# EAGLE board Parachute_V1.5 (EAGLE 9.6.2)
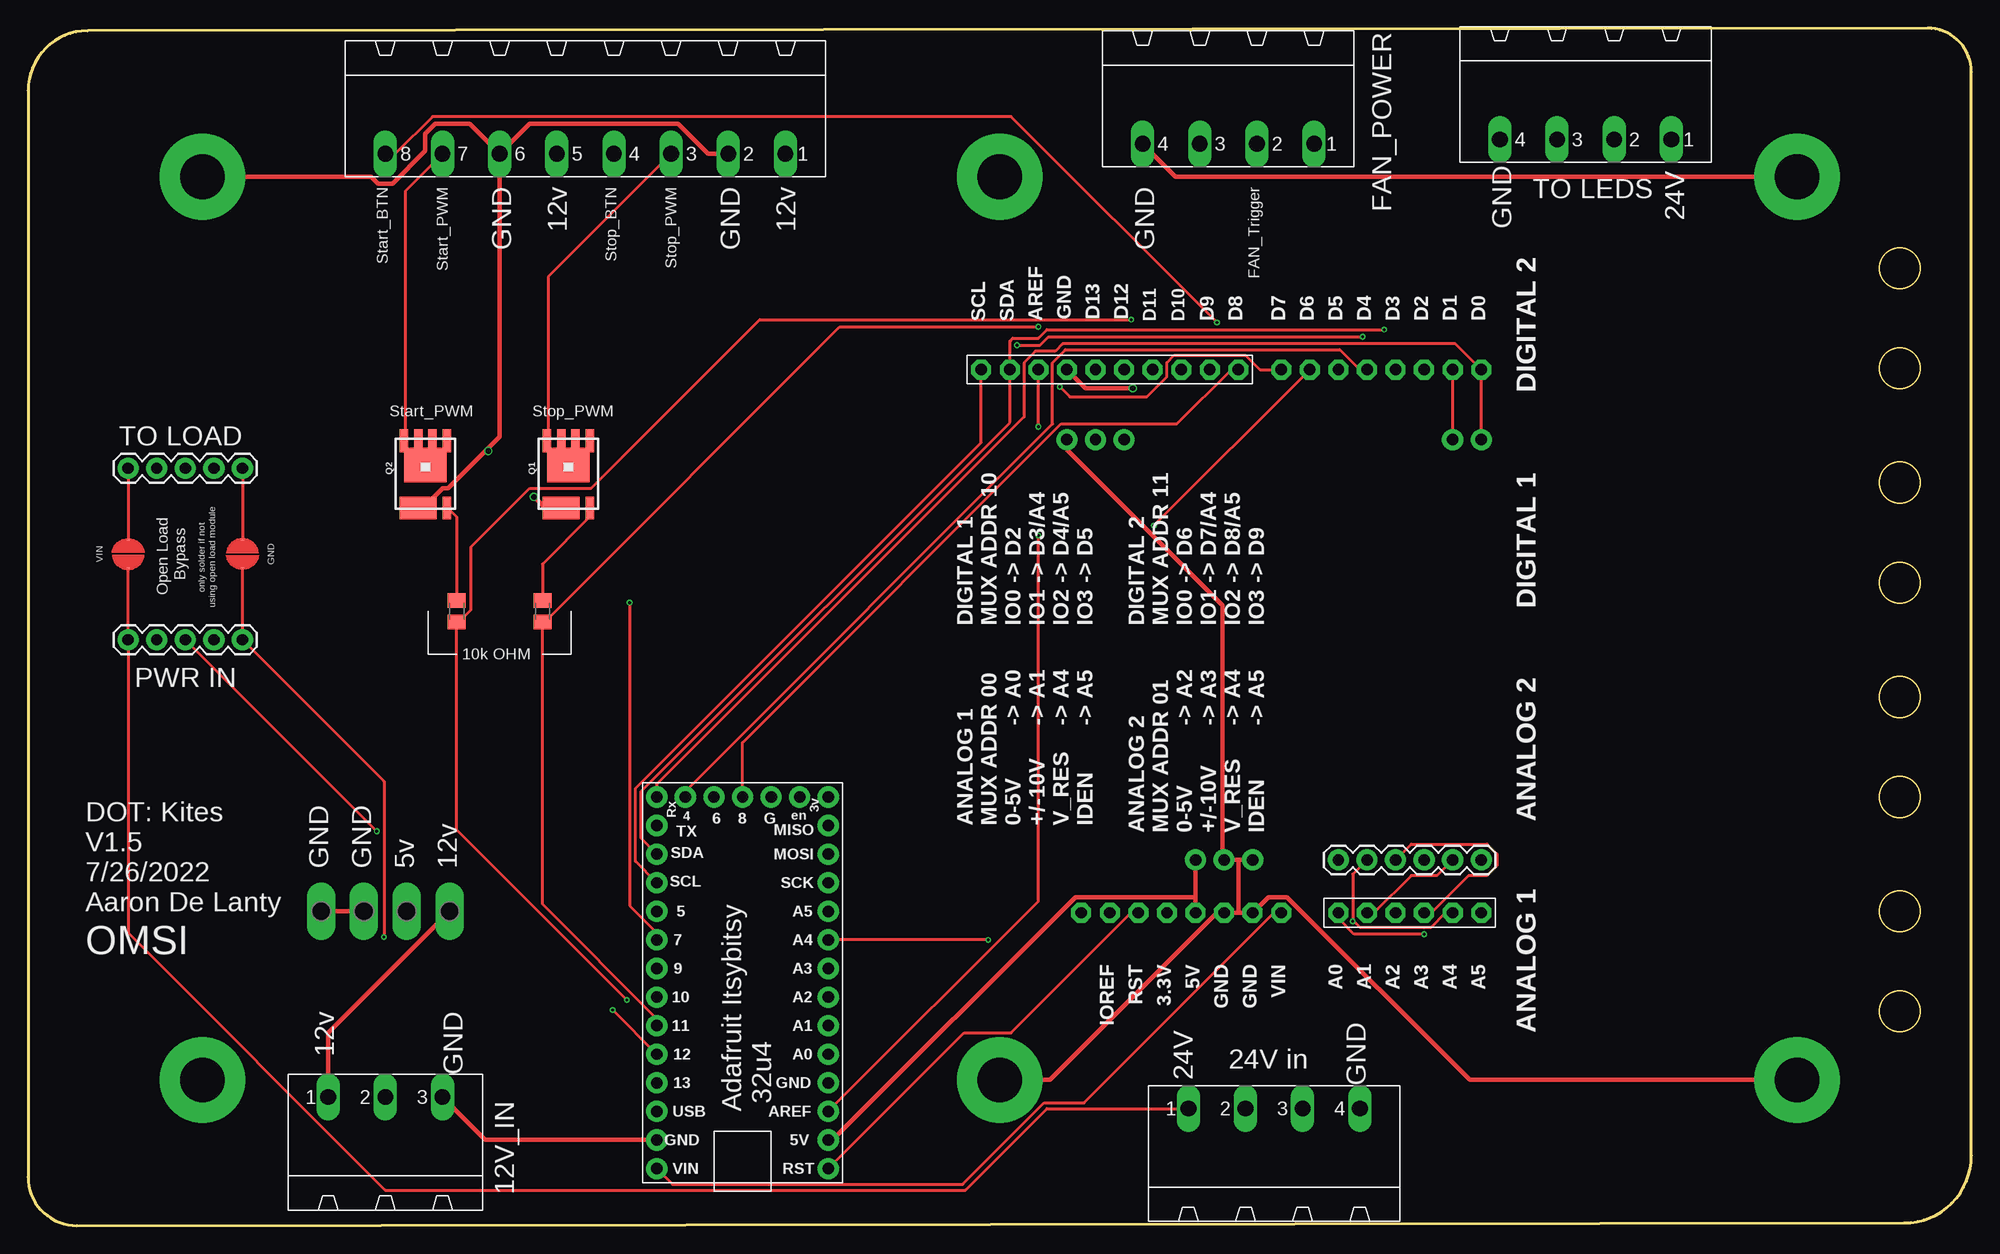
[diagram p0: board, top side]
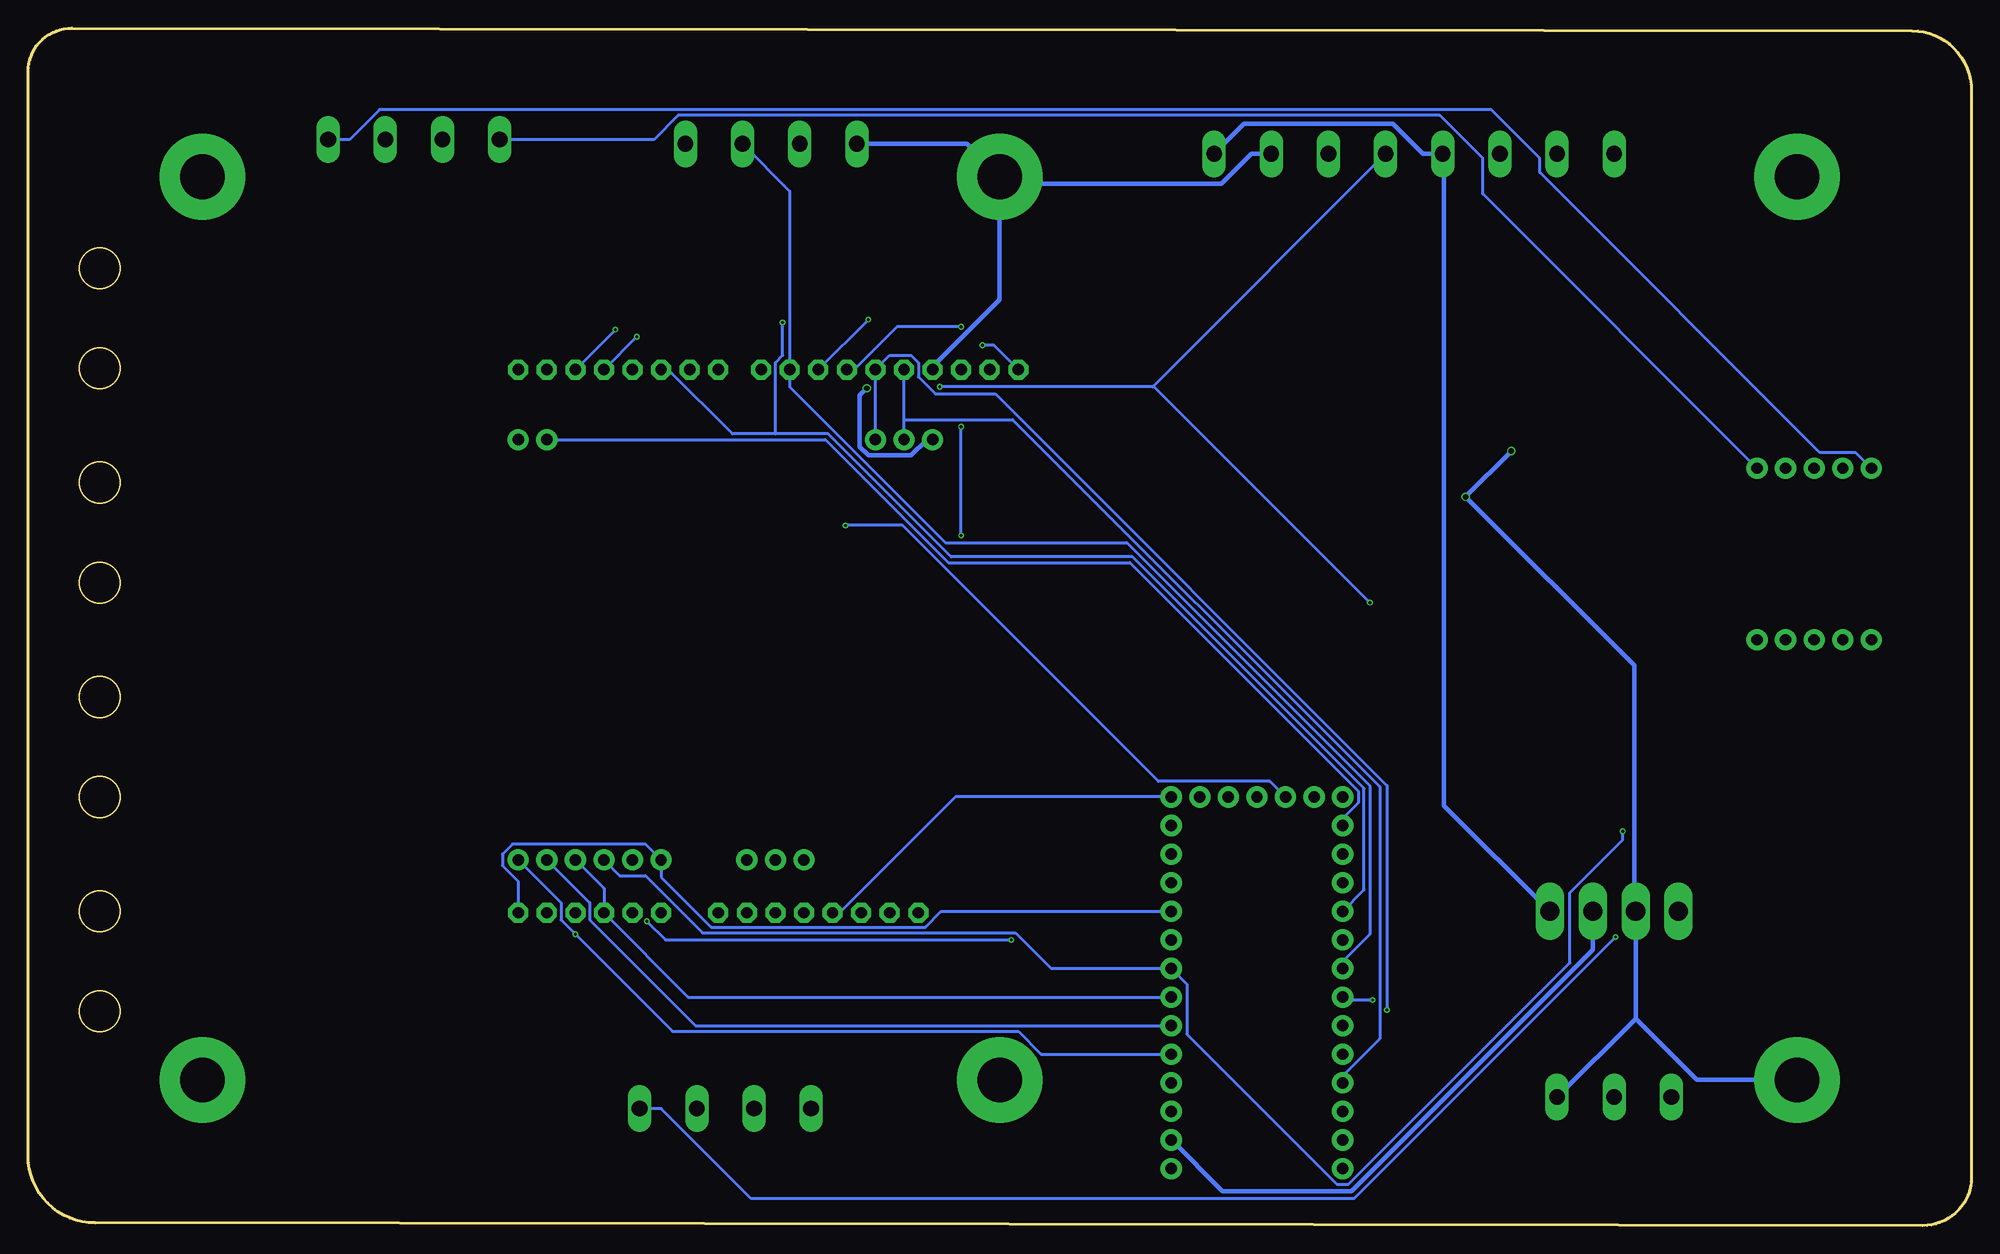
[diagram p1: board, bottom side, seen from below]

Size 172.72 x 106.41 mm. Coordinates in mm from the lower left corner, seen from the top.
Outline: 168.83,106.41 5.28,106.17 arc90 0,100.89 0,4.33 arc90 4.33,0 166.75,0.24 arc90 172.72,6.22 172.72,102.53 arc90 168.83,106.41
Outline: circle at 166.37,19.04 radius 1.8
Outline: circle at 166.37,27.93 radius 1.8
Outline: circle at 166.37,38.09 radius 1.8
Outline: circle at 166.37,46.98 radius 1.8
Outline: circle at 166.37,57.14 radius 1.8
Outline: circle at 166.37,66.03 radius 1.8
Outline: circle at 166.37,76.19 radius 1.8
Outline: circle at 166.37,85.08 radius 1.8
Copper layers (1*16): Top 0.035559375mm / dielectric 1.6mm / Bottom 0.035559375mm
Design rules "oshpark-2layer (1) *": minimum track width 10mil, minimum drill 10mil, track to track 10mil, track to pad 10mil, pad to pad 8mil, via to via 10mil, smd to smd 8mil, copper to edge 15mil, drill to drill 6mil, minimum pad ring 5mil, minimum via ring 5mil, stop-mask expansion 2.5mil, vias tented up to drill 25mil, thermal gap 10mil
Net classes: 1 High Power: width 0.406 mm, drill 0.483 mm

## Footprints (pad centres in the part's own frame; a part is rotated, then mirrored left to right if it is on the bottom)
M0805 = smd 1.3 x 1.6: 1 -0.95,0; 2 0.95,0
MSTBA3 = drill 1.397 long: 1 -5.08,5.08; 2 0,5.08; 3 5.08,5.08
MSTBA4 = drill 1.397 long: 1 -7.62,5.08; 2 -2.54,5.08; 3 2.54,5.08; 4 7.62,5.08
HEADER_PIN_1X05 = drill 1.016 pad 1.88: 1 0,0; 2 2.54,0; 3 5.08,0; 4 7.62,0; 5 10.16,0
1X08-CLEANBIG = drill 1.016 pad 1.778 octagon: 1 -8.89,0; 2 -6.35,0; 3 -3.81,0; 4 -1.27,0; 5 1.27,0; 6 3.81,0; 7 6.35,0; 8 8.89,0
1X06-BIG = drill 1.016 pad 1.778 octagon: 1 -6.35,0; 2 -3.81,0; 3 -1.27,0; 4 1.27,0; 5 3.81,0; 6 6.35,0
SMT-JUMPER_2_NO_NO-SILK_ROUND = smd 0.152 x 0.305: 1 -1.27,0; 2 1.27,0
1X03_NO_SILK = drill 1.016 pad 1.88: 1 0,0; 2 2.54,0; 3 5.08,0
1X02_NO_SILK = drill 1.016 pad 1.88: 1 0,0; 2 2.54,0
1X06 = drill 1.016 pad 1.88: 1 0,0; 2 2.54,0; 3 5.08,0; 4 7.62,0; 5 10.16,0; 6 12.7,0
SO-8_POWER_PAK = smd 0.762 x 2.032: D1 -3.423,2.437; D2 -2.153,2.437; D3 -0.883,2.437; D4 0.387,2.437; G 0.387,-3.532 | smd 3.81 x 3.048: D5 -1.518,0.278 | smd 3.302 x 2.032: S -2.153,-3.532
STANDOFF_ELECTRICAL_5_32 = drill 3.969 pad 7.62: P1 0,0
P2-38-17 = drill 1.702 pad 2.121 long: TP-1 -1.905,0; TP-2 1.905,0
ADAFRUIT_LENOARDO = drill 1.016 pad 1.88: 3V -10.16,-21.59; 5V -10.16,8.89; A0 -10.16,1.27; A1 -10.16,-1.27; A2 -10.16,-3.81; A3 -10.16,-6.35; A4 -10.16,-8.89; A5 -10.16,-11.43; AREF -10.16,6.35; D4 2.54,-21.59; D5 5.08,-11.43; D6 0,-21.59; D7 5.08,-8.89; D8 -2.54,-21.59; D9 5.08,-6.35; D10 5.08,-3.81; D11 5.08,-1.27; D12 5.08,1.27; D13 5.08,3.81; EN -7.62,-21.59; GND@0 -10.16,3.81; GND@1 -5.08,-21.59; GND@2 5.08,8.89; MISO -10.16,-19.05; MOSI -10.16,-16.51; RES -10.16,11.43; RX 5.08,-21.59; SCK -10.16,-13.97; SCL 5.08,-13.97; SDA 5.08,-16.51; TX 5.08,-19.05; USB 5.08,6.35; VIN 5.08,11.43
1X10-BIG = drill 1.016 pad 1.778 octagon: 1 -11.43,0; 2 -8.89,0; 3 -6.35,0; 4 -3.81,0; 5 -1.27,0; 6 1.27,0; 7 3.81,0; 8 6.35,0; 9 8.89,0; 10 11.43,0
MSTBA8 = drill 1.397 long: 1 -17.78,5.08; 2 -12.7,5.08; 3 -7.62,5.08; 4 -2.54,5.08; 5 2.54,5.08; 6 7.62,5.08; 7 12.7,5.08; 8 17.78,5.08
PHOENIX_508_4PIN = drill 1.397 long: 1 -7.62,5.08; 2 -2.54,5.08; 3 2.54,5.08; 4 7.62,5.08

## Placement (x,y rotation side)
10K  [M0805]  45.72,54.6 270 top
10K1  [M0805]  38.1,54.6 270 top
12V_IN  MSTBA3  [MSTBA3]  31.75,6.34 0 top
FAN_POWER  MSTBA4  [MSTBA4]  106.68,101.21 180 top
J1  [HEADER_PIN_1X05]  8.89,67.3 0 top
J2  [HEADER_PIN_1X05]  8.89,52.06 0 top
JP1  [1X08-CLEANBIG]  120.27,76.07 180 top
JP2  [1X08-CLEANBIG]  102.49,27.81 180 top
JP3  [1X06-BIG]  122.81,27.81 0 top
JP4  JUMPER-SMT_2_NO_NO-SILK_ROUND  [SMT-JUMPER_2_NO_NO-SILK_ROUND]  8.89,59.68 270 top
JP5  JUMPER-SMT_2_NO_NO-SILK_ROUND  [SMT-JUMPER_2_NO_NO-SILK_ROUND]  19.05,59.68 90 top
JP9  [1X03_NO_SILK]  103.76,32.51 0 top
JP10  [1X03_NO_SILK]  92.33,69.84 0 top
JP11  M021X02_NO_SILK  [1X02_NO_SILK]  126.62,69.84 0 top
JP12  Male  [1X06]  116.46,32.51 0 top
Q1  MOSFET-NCH  [SO-8_POWER_PAK]  49.53,67.3 0 top
Q2  MOSFET-NCH  [SO-8_POWER_PAK]  36.83,67.3 0 top
S1  STANDOFF_ELECTRICAL5-32  [STANDOFF_ELECTRICAL_5_32]  15.49,93.21 0 top
S2  STANDOFF_ELECTRICAL5-32  [STANDOFF_ELECTRICAL_5_32]  86.36,93.21 0 top
S3  STANDOFF_ELECTRICAL5-32  [STANDOFF_ELECTRICAL_5_32]  157.23,12.95 0 top
S4  STANDOFF_ELECTRICAL5-32  [STANDOFF_ELECTRICAL_5_32]  157.23,93.21 0 top
S6  STANDOFF_ELECTRICAL5-32  [STANDOFF_ELECTRICAL_5_32]  86.36,12.95 0 top
S8  STANDOFF_ELECTRICAL5-32  [STANDOFF_ELECTRICAL_5_32]  15.49,12.95 0 top
TP1  PTR2  [P2-38-17]  27.94,27.93 0 top
TP2  PTR2  [P2-38-17]  35.56,27.93 0 top
U1  ITSYBITSY_5V  [ADAFRUIT_LENOARDO]  60.96,16.5 180 top
U$1  PINHD-1X10  [1X10-BIG]  96.14,76.07 180 top
X1  MSTBA8  [MSTBA8]  49.53,100.32 180 top
X2  PHOENIX_508_4PIN  [PHOENIX_508_4PIN]  138.43,101.59 180 top
X3  PHOENIX_508_4PIN  [PHOENIX_508_4PIN]  110.74,5.33 0 top

## Library data of the parts
10K 10K1 JP1-JP3 U$1 = adafruit
12V_IN = con-phoenix-508; MF: FARNELL; MPN: 1757255; OC_FARNELL: 3705183; OC_NEWARK: 71C4162
FAN_POWER = th_libraries; MF: FARNELL; MPN: 1757268; OC_FARNELL: 3705195; OC_NEWARK: 71C4163
J1 J2 = OMSI_Default_V1
JP4 JP5 = SparkFun-Jumpers
JP9-JP12 = SparkFun-Connectors
Q1 Q2 U1 = th_ds_libraries
S1-S4 S6 S8 = th_libraries
TP1 TP2 = testpad
X1 = con-phoenix-508; MF: FARNELL; MPN: 1757307; OC_FARNELL: 3705225; OC_NEWARK: 71C4166
X2 X3 = OMSI_Default_V1; MF: FARNELL; MPN: 1757268; OC_FARNELL: 3705195; OC_NEWARK: 71C4163

## Nets
5V [High Power]: JP2.4 JP9.1 TP2.TP-1 U1.5V
12V [High Power]: 12V_IN.1 TP2.TP-2 X1.1 X1.5
A3: J2.3 JP3.4 JP12.3 U1.A3
GND [High Power]: 12V_IN.3 FAN_POWER.4 JP2.2 JP2.3 JP9.2 JP9.3 JP10.1 Q1.S Q2.S S1.P1 S2.P1 S3.P1 S4.P1 S6.P1 S8.P1 TP1.TP-1 TP1.TP-2 U1.GND@2 U$1.7 X1.2 X1.6
N$1: Q2.D1 X1.7
N$2: Q1.D1 X1.3
N$3: JP1.1 JP11.2 U1.RX
N$4: U1.D8 U$1.1
N$5: JP1.2 JP11.1 U1.TX
N$6: U1.AREF U$1.8
N$7: 10K.1 Q1.G
N$8: JP3.1 JP12.6 U1.A0
N$9: 10K1.1 Q2.G
N$10: JP3.2 JP12.5 U1.A1
N$11: JP3.3 JP12.4 U1.A2
N$12: JP10.3 U1.D12 U$1.5
N$13: JP3.5 JP12.2 U1.A4
N$14: JP3.6 JP12.1 U1.A5
N$15: JP10.2 U1.D13 U$1.6
N$16: JP1.3 U1.SDA U$1.9
N$17: JP1.4 U1.SCL U$1.10
N$19: JP1.6 U1.D5 X1.8
N$20: JP1.7 U1.D6
N$21: JP1.8 U1.D7 X1.4
N$22: JP1.5 U1.D4
N$23: JP2.6 U1.RES
N$24: J1.1 JP4.1 X2.1
N$25: JP2.5 U1.3V
N$26: J1.5 JP5.2 X2.4
N$27: FAN_POWER.2 U1.D9 U$1.2
N$28: 10K1.2 U1.D10 U$1.3
N$29: 10K.2 U1.D11 U$1.4
N$31: JP2.1 U1.VIN
N$33: J2.5 JP5.1 X3.4
N$35: J2.1 JP4.2 X3.1

## Tracks (layer width: path | path; a pad name or v marks a point on that pad's centre or on a via)
5V
  Top 0.406: JP9.1 103.76,29.2 | 103.76,29.2 JP2.4 | U1.5V 71.5,7.61 93.09,29.2 103.76,29.2
  Bottom 0.406: TP2.TP-1 33.66,24.5 55.12,3.04 66.55,3.04 U1.5V
12V
  Top 0.406: 12V_IN.1 26.67,17.14 TP2.TP-2
  Bottom 0.406: X1.1 64.64,97.91 51.44,97.91 48.77,95.24 X1.5 46.86,95.12 46.86,37.33 TP2.TP-2
A3  (via drill 0.25)
  Top 0.254: JP3.4 124.71,27.81 128.02,31.11 129.67,31.11 130.56,32 130.56,33.01 129.67,33.9 122.94,33.9 JP12.3 | v30.99,35.05 J2.3
  Bottom 0.254: JP12.3 120.14,31.11 117.86,31.11 112.78,26.03 84.96,26.03 81.79,22.85 U1.A3 69.72,21.46 69.72,17.01 56.39,3.68 55.37,3.68 35.69,23.36 35.69,29.58 30.99,34.28 v30.99,35.05
GND  (via drill 0.48)
  Top 0.406: TP1.TP-2 TP1.TP-1 | U1.GND@2 40.64,7.61 12V_IN.3 | 40.77,68.95 41.91,70.1 X1.6 | 40.77,68.95 37.34,65.53 36.83,65.53 35.18,63.87 34.8,63.87 Q2.S | v44.96,64.76 45.85,63.87 47.37,63.87 Q1.S | v40.89,68.83 40.77,68.95 | X1.2 60.45,95.24 57.78,97.91 44.58,97.91 X1.6 | S1.P1 30.48,93.21 31.11,92.58 32.38,92.58 35.31,95.5 35.31,97.02 36.2,97.91 39.24,97.91 X1.6 | 107.57,27.81 JP2.2 110.24,29.2 111.89,29.2 128.14,12.95 S3.P1 | 107.57,27.81 JP2.3 106.17,27.68 105.54,27.68 90.81,12.95 S6.P1 | JP9.3 107.57,32.51 | 107.57,32.51 JP9.2 106.17,32.63 106.17,55.11 92.33,68.95 JP10.1 | 107.57,32.51 107.57,27.81 | v98.17,74.42 93.98,74.42 U$1.7 | S4.P1 101.98,93.21 FAN_POWER.4
  Bottom 0.406: 29.84,18.41 TP1.TP-2 29.97,28.06 29.97,49.78 v44.96,64.76 v40.89,68.83 | 12V_IN.3 29.84,18.41 | S8.P1 24.38,12.95 29.84,18.41 | U$1.7 92.33,76.32 86.36,82.29 S2.P1 | JP10.1 92.84,69.84 94.23,68.45 98.04,68.45 98.81,69.21 98.81,73.78 v98.17,74.42 | FAN_POWER.4 89.28,96.13 S2.P1 | X1.2 64.01,95.24 66.67,92.58 86.23,92.58 S2.P1
N$1
  Top 0.254: X1.7 33.53,91.94 33.53,69.84 Q2.D1
N$2
  Top 0.254: X1.3 46.23,84.32 46.23,69.84 Q1.D1
N$3
  Top 0.254: JP11.2 JP1.1 126.87,78.35 91.95,78.35 91.31,77.72 89.53,77.72 88.52,76.7 88.52,71.88 55.88,39.24 U1.RX
N$4
  Top 0.254: U$1.1 106.93,76.07 102.11,71.24 91.82,71.24 63.5,42.92 U1.D8
N$5
  Top 0.254: JP11.1 JP1.2
  Bottom 0.254: U1.TX 55.88,36.19 54.48,37.59 54.48,38.6 74.8,58.92 90.93,58.92 101.85,69.84 JP11.1
N$6  (via drill 0.25)
  Top 0.254: v89.79,70.99 U$1.8 | v89.79,61.33 89.79,28.82 U1.AREF
  Bottom 0.254: v89.79,61.33 v89.79,70.99
N$7
  Top 0.254: 10K.1 45.72,58.79 49.91,62.99 49.91,63.75 Q1.G
N$8  (via drill 0.25)
  Top 0.254: JP3.1 116.46,27.3 117.86,25.9 v124.08,25.9
  Bottom 0.254: JP12.6 125.35,28.7 125.35,27.17 v124.08,25.9 115.44,17.27 84.71,17.27 82.68,15.23 U1.A0
N$9
  Top 0.254: 10K1.1 38.1,62.99 37.34,63.75 Q2.G
N$10
  Top 0.254: JP3.2 119.63,27.81 122.94,31.11 125.22,31.11 JP12.5
  Bottom 0.254: U1.A1 113.41,17.77 122.81,27.17 122.81,28.7 JP12.5
N$11
  Bottom 0.254: JP12.4 121.54,29.97 JP3.3 114.05,20.31 U1.A2
N$12  (via drill 0.25)
  Top 0.254: v51.94,19.17 U1.D12
  Bottom 0.254: JP10.3 U$1.5 96.14,77.34 94.23,77.34 93.6,76.7 93.6,75.43 92.07,73.91 86.74,73.91 51.94,39.11 v51.94,19.17
N$13  (via drill 0.25)
  Top 0.254: JP3.5 125.98,27.81 124.71,26.54 118.36,26.54 117.79,27.11 | 117.79,27.11 117.73,27.17 117.73,31.24 JP12.2 | v85.34,25.39 U1.A4 | v117.73,27.04 117.79,27.11
  Bottom 0.254: v85.34,25.39 116.08,25.39 v117.73,27.04
N$14
  Bottom 0.254: JP3.6 129.16,30.6 130.56,32 130.56,33.01 129.67,33.9 117.86,33.9 JP12.1 116.46,30.98 112.01,26.54 92.96,26.54 91.57,27.93 U1.A5
N$15
  Bottom 0.254: JP10.2 94.87,71.62 | 94.87,71.62 U$1.6 | U1.D13 55.88,13.33 52.58,16.63 52.58,38.98 85.22,71.62 94.87,71.62
N$16  (via drill 0.25)
  Top 0.254: U1.SDA 54.48,34.41 54.48,38.6 87.25,71.37 U$1.9 87.25,78.61 87.5,78.86 89.79,78.86 90.55,79.62 v120.52,79.62
  Bottom 0.254: v120.52,79.62 JP1.3
N$17  (via drill 0.25)
  Top 0.254: U$1.10 84.71,69.59 53.98,38.86 53.98,32.38 U1.SCL | v118.62,78.99 90.68,78.99 89.92,78.23 v87.88,78.23
  Bottom 0.254: v118.62,78.99 JP1.4 | v87.88,78.23 86.87,78.23 U$1.10
N$19  (via drill 0.25)
  Top 0.254: X1.8 32.64,95.24 35.94,98.55 87.38,98.55 v105.66,80.26
  Bottom 0.254: JP1.6 115.82,76.07 110.11,70.35 106.3,70.35 | 106.3,70.35 101.6,70.35 90.68,59.43 74.55,59.43 53.98,38.86 53.98,29.84 U1.D5 | v105.66,80.26 105.66,77.34 106.3,76.7 106.3,70.35
N$20  (via drill 0.25)
  Top 0.254: v100.08,62.22 JP1.7
  Bottom 0.254: v100.08,62.22 95,62.22 72.26,39.49 62.36,39.49 U1.D6
N$21  (via drill 0.25)
  Top 0.254: JP1.8 109.47,76.07 108.2,77.34 101.85,77.34 101.22,76.7 101.22,75.43 99.44,73.65 92.58,73.65 v91.69,74.54 | U1.D7 55.88,26.03 53.47,28.44 v53.47,55.37
  Bottom 0.254: v91.69,74.54 72.77,74.54 72.71,74.61 | X1.4 72.71,74.61 | 72.71,74.61 v53.47,55.37
N$22
  Top 0.254: JP1.5 118.36,76.07 116.59,77.84 92.2,77.84 91.06,76.7 91.06,71.24 58.42,38.6 U1.D4
N$23
  Top 0.254: JP2.6 98.04,27.81 87.38,17.14 83.19,17.14 U1.RES
N$24
  Top 0.254: J1.1 JP4.1
  Bottom 0.254: X2.1 144.15,96.51 141.48,99.18 42.67,99.18 38.35,94.86 38.35,93.59 13.46,68.7 10.29,68.7 J1.1
N$25
  Bottom 0.254: JP2.5 100.58,27.81 90.3,38.09 U1.3V
N$26
  Top 0.254: J1.5 JP5.2
  Bottom 0.254: X2.4 117.09,96.51 114.94,98.67 47.24,98.67 43.43,94.86 43.43,91.69 J1.5
N$27
  Bottom 0.254: FAN_POWER.2 105.03,91.94 U$1.2 105.03,74.54 91.19,60.7 75.06,60.7 53.47,39.11 53.47,25.9 55.88,23.49 U1.D9
N$28  (via drill 0.25)
  Top 0.254: 38.1,53.46 38.1,35.17 v53.21,20.06 | 38.1,53.46 10K1.2 38.1,53.59 | v98.04,80.51 65.02,80.51 50.04,65.53 44.58,65.53 39.37,60.32 39.37,54.73 38.1,53.46
  Bottom 0.254: v53.21,20.06 55.63,20.06 U1.D10 | v98.04,80.51 U$1.3
N$29  (via drill 0.25)
  Top 0.254: 45.72,53.46 45.72,28.57 55.88,18.41 U1.D11 | 45.72,53.46 10K.2 45.72,53.59 | v89.79,79.88 72.14,79.88 45.72,53.46
  Bottom 0.254: U$1.4 99.31,76.07 95.5,79.88 v89.79,79.88
N$31
  Top 0.254: JP2.1 110.74,27.81 93.85,10.92 90.3,10.92 83.06,3.68 57.28,3.68 U1.VIN
N$33  (via drill 0.25)
  Top 0.254: JP5.1 J2.5 31.62,39.49 v31.62,25.65
  Bottom 0.254: X3.4 116.46,10.41 108.46,2.41 54.86,2.41 v31.62,25.65
N$35
  Top 0.254: JP4.2 J2.1 8.89,26.03 31.75,3.17 83.31,3.17 90.55,10.41 X3.1

## Text on the board
tPlace: SCL | DIGITAL 2 | DIGITAL 1 | -> A0 / -> A1 / -> A4 / -> A5 | ANALOG 2 | IOREF | RST | 3.3V | 5V | GND | GND | VIN | A0 | A1 | A2 | A3 | A4 | A5 | ANALOG 1 | Adafruit Itsybitsy / 32u4
tNames: GND | 24V | Start_BTN | Start_PWM | GND | 12v | Stop_BTN | Stop_PWM | GND | 12v | GND | FAN_Trigger | TO LEDS | SDA | AREF | GND | D13 | D12 | D11 | D10 | D9 | D8 | D7 | D6 | D5 | D4 | D3 | D2 | D1 | D0 | Start_PWM | Stop_PWM | TO LOAD | VIN | Open Load / Bypass | only solder if not / using open load module | GND | DIGITAL 1 / MUX ADDR 10 / IO0 -> D2 / IO1 -> D3/A4 / IO2 -> D4/A5 / IO3 -> D5 | DIGITAL 2 / MUX ADDR 11 / IO0 -> D6 / IO1 -> D7/A4 / IO2 -> D8/A5 / IO3 -> D9 | 10k OHM | PWR IN | -> A2 / -> A3 / -> A4 / -> A5 | ANALOG 1 / MUX ADDR 00 / 0-5V / +/-10V / V_RES / IDEN | ANALOG 2 / MUX ADDR 01 / 0-5V / +/-10V / V_RES / IDEN | GND | GND | 5v | 12v | DOT: Kites / V1.5 / 7/26/2022 / Aaron De Lanty | OMSI | 12v | GND | 24V in | 24V | GND